# Altium PCB PCB.PcbDoc
Units mm, origin at the board's own origin, x right, y up, seen from the top; angles counter-clockwise.
Board outline 42.29 x 26.42 mm, 2 copper layers (Top Layer, Bottom Layer); 24 components, 17 nets, 73 pads, 7 vias.
Unrouted connection lines stored in the file: 2.
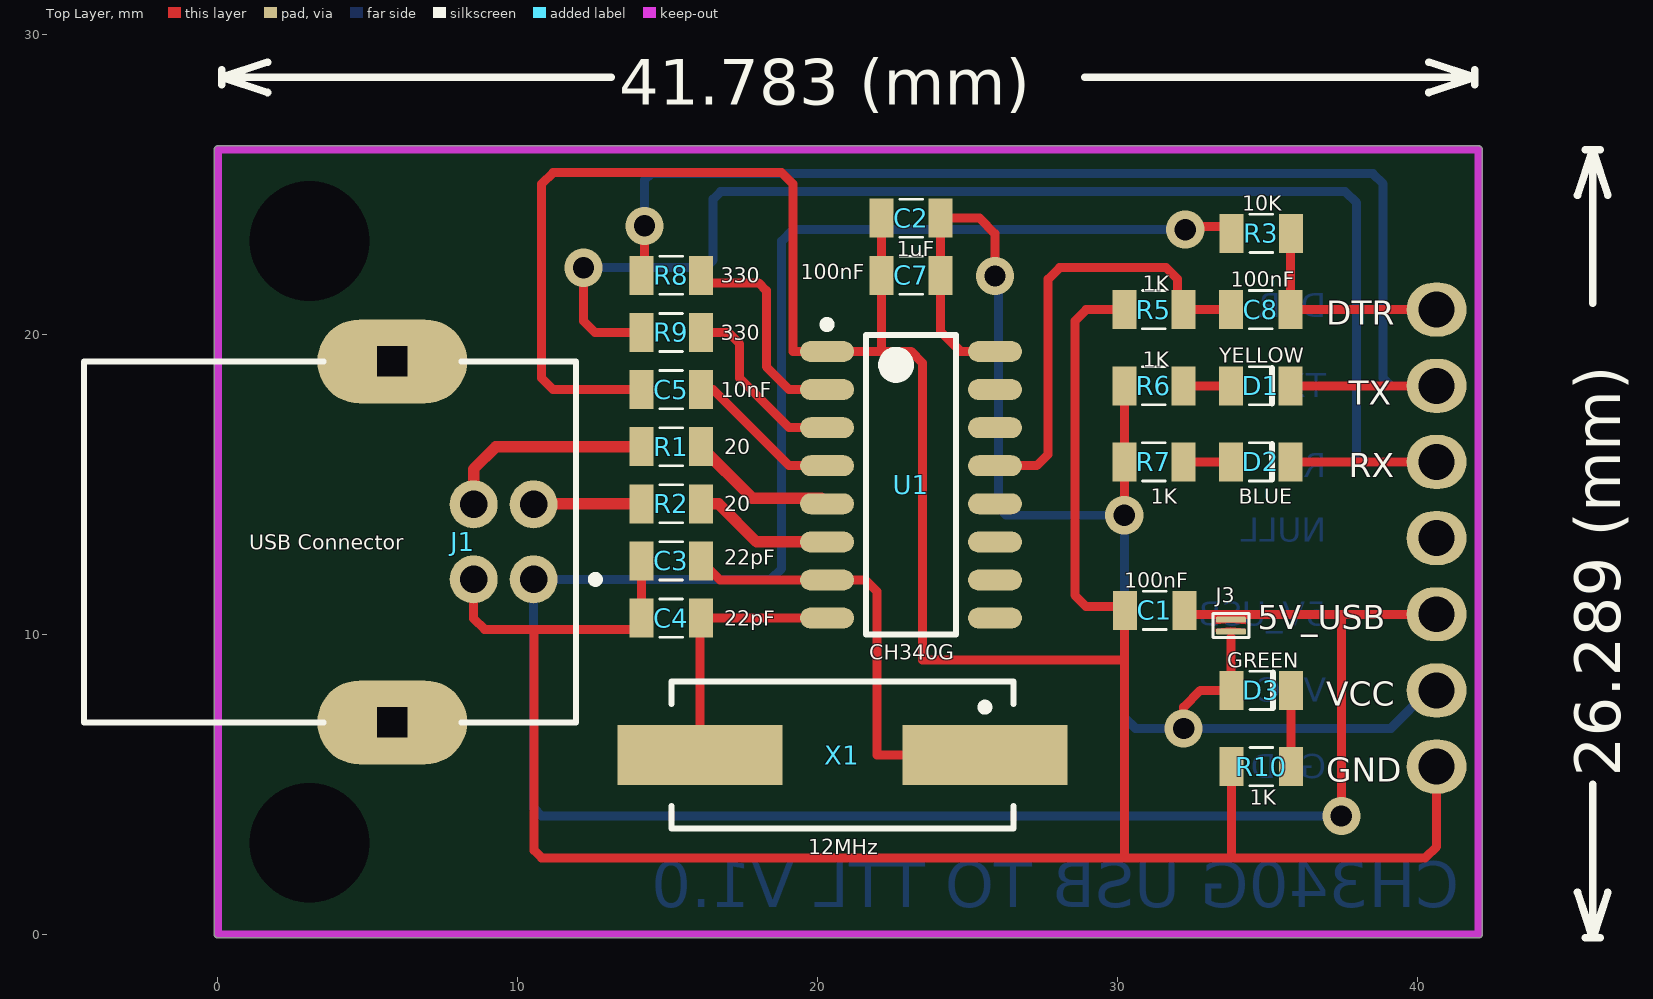
[diagram p0: Top Layer view]
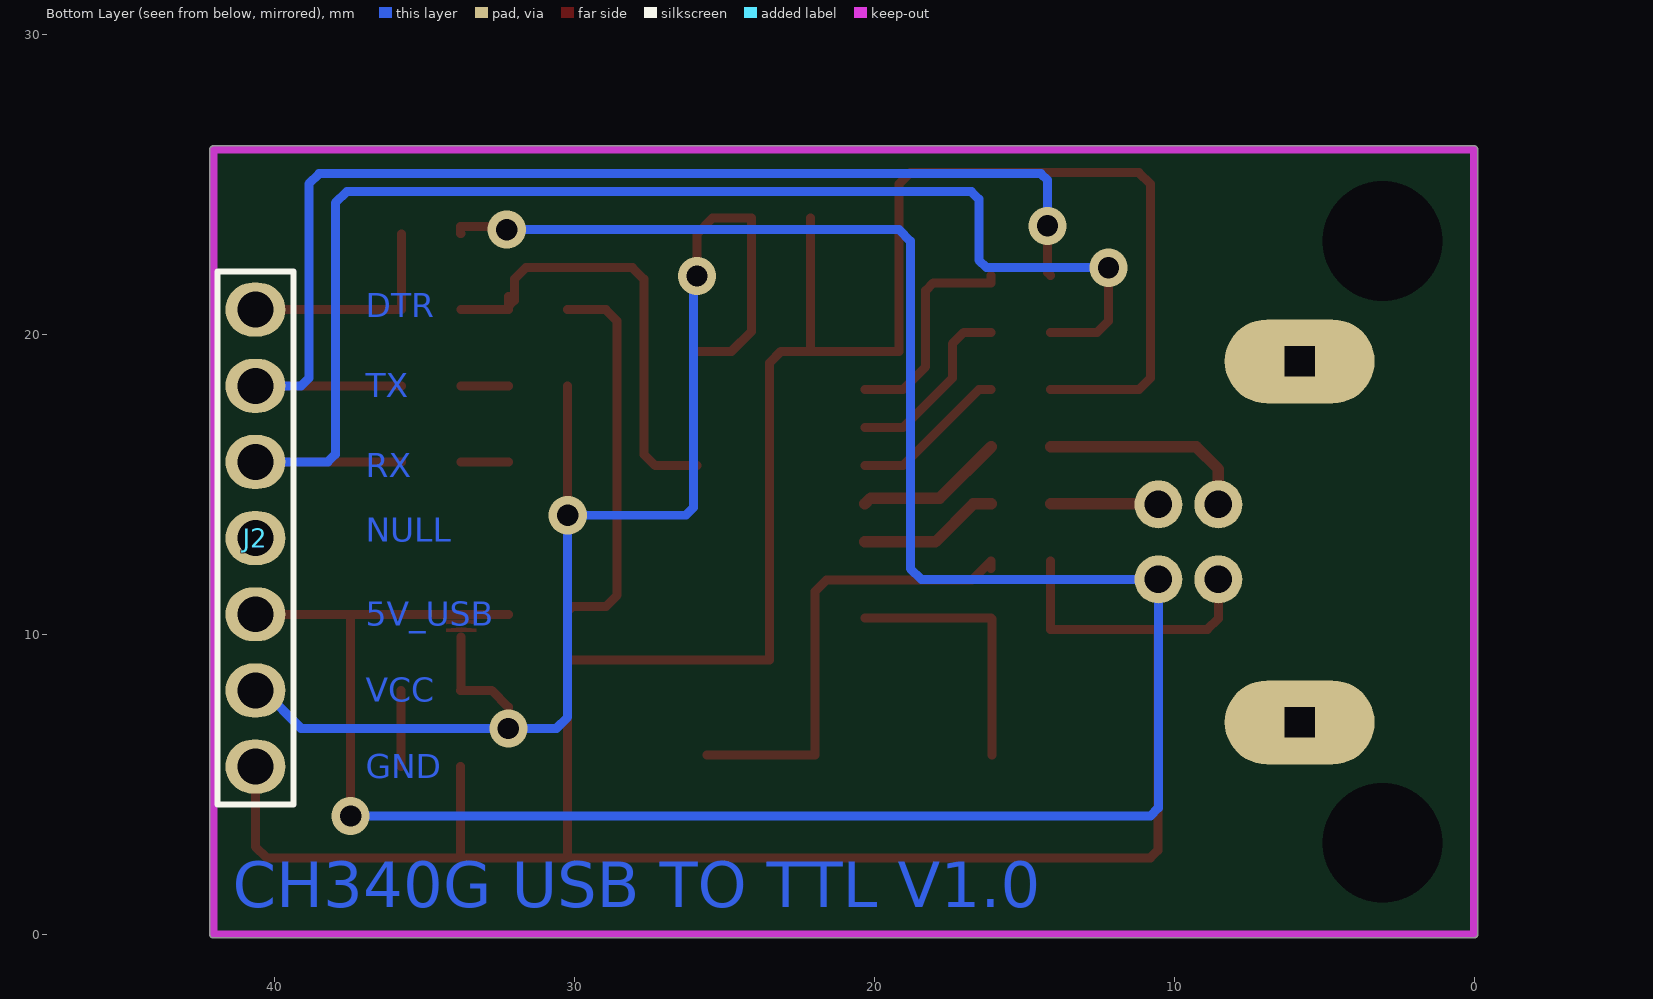
[diagram p1: Bottom Layer view, seen from below]

## Layer stack, top to bottom
Top Solder: solder mask 0.0102, Solder Resist, Dk 3.5
Top Layer: signal copper 0.0356
Dielectric 1: dielectric 0.32, FR-4, Dk 4.8
Bottom Layer: signal copper 0.0356
Bottom Solder: solder mask 0.0102, Solder Resist, Dk 3.5

## Board outline
0,-0.127 cw(c0,0) -0.127,0 -0.127,26.162 cw(c0,26.162) 0,26.289 42.037,26.289 cw(c42.037,26.162) 42.164,26.162 42.164,0 cw(c42.037,0) 42.037,-0.127

## Design rules (kind name [scope] priority, off if disabled: settings)
Clearance [All] p1: gap=0.3
DiffPairsRouting [All] p1: maxlimit=0.254 minlimit=0.254 mostfreqgap=0.254 toplayer_minwidth=0.381 toplayer_maxwidth=0.381 toplayer_prefwidth=0.381 bottomlayer_minwidth=0.381 bottomlayer_maxwidth=0.381 bottomlayer_prefwidth=0.381 maxuncoupledlength=12.7
PolygonConnect [All] p1: connectstyle=Relief reliefconductorwidth=0.254 reliefentries=4 polygonreliefangle="90 Angle" airgapwidth=0.254
RoomDefinition Main [InComponentClass('Main')] p1: confinementstyle=ConfineIn formatcopy=TRUE lockcomponents=FALSE outline -24.638,-46.101 26.162,-46.101 26.162,-20.701 -24.638,-20.701
RoutingVias [All] p1: holewidth=0.711 width=1.27 viastyle="Through Hole" minholewidth=0.5 minwidth=0.8 maxholewidth=0.711 maxwidth=1.27
SolderMaskExpansion [All] p1: expansion=0.102
Width [All] p1: maxlimit=0.3 minlimit=0.3 preferedwidth=0.3
29 further rules are at their usual default settings.

## Classes and differential pairs
differential pair USB2: +USB2_P -USB2_N

## Components (designator, comment, footprint, x,y, rotation, side; value= is the part's Value field where it differs from the comment)
C1 "100nF" 0805 31.242,10.795 r0 top
C2 "1uF" 0805 23.114,23.876 r0 top
C3 "22pF" 0805 15.113,12.446 r180 top
C4 "22pF" 0805 15.113,10.541 r180 top
C5 "10nF" 0805 15.113,18.161 r180 top
C7 "100nF" 0805 23.114,21.971 r0 top
C8 "100nF" 0805 34.773,20.828 r180 top
D1 "YELLOW" 0805_Diode 34.773,18.288 r0 top
D2 "BLUE" 0805_Diode 34.773,15.748 r0 top
D3 "GREEN" 0805_Diode 34.798,8.128 r0 top
J1 "USB Connector" USB2.5-2H4D 9.525,13.081 r180 top
J2 "7PIN" HDR1X7 40.64,20.828 r270 bottom
J3 "Jumper 2pin" Jumper_Solder_2Pad_100X60 33.782,10.287 r270 top
R1 "20" 0805 15.113,16.256 r180 top
R2 "20" 0805 15.113,14.351 r180 top
R3 "10K" 0805 34.798,23.368 r180 top
R5 "1K" 0805 31.217,20.828 r0 top
R6 "1K" 0805 31.217,18.288 r0 top
R7 "1K" 0805 31.217,15.748 r0 top
R8 "330" 0805 15.113,21.971 r180 top
R9 "330" 0805 15.113,20.066 r180 top
R10 "1K" 0805 34.798,5.588 r180 top
U1 "CH340G" SOIC127P602-16BM 23.114,14.986 r0 top
X1 "12MHz" HC49/4H_SMX 20.828,5.969 r180 top

## Footprints (in the part's own frame and the unit in brackets; to place one, negate y for a bottom-side part, rotate by r counter-clockwise, add the part's x,y. Pads: shape width x height; smd on the part's side, far side on the other; paste and mask are expansions set on the pad)
0805 [mm] "Chip Resistor, Body 2.0x1.3mm, IPC Medium Density"
  rect 0.8x1.3 smd: 1(-0.991,0) 2(0.991,0)
  silkscreen extent -0.38,-0.64 0.38,0.64, body extent -1.07,-0.7 1.07,0.7, height 0.65
0805_Diode [mm] "Chip Resistor, Body 2.0x1.3mm, IPC Medium Density"
  rect 0.8x1.3 smd: 1(-0.991,0) 2(0.991,0)
  silkscreen extent -0.38,-0.64 0.38,0.64, body extent -1.07,-0.7 1.07,0.7, height 0.65
HC49/4H_SMX [mm] "Quartz Crystal, SM; Body 13.4 (inc. leads) x 4.9 mm (LxW max)"
  rect 5.5x2 smd: 1(-4.75,0) 2(4.75,0)
  silkscreen extent -5.7,-2.45 5.7,2.45
HDR1X7 [mm]
  oval 1.8x2 hole 1.2: 1(0,0) 2(2.54,0) 3(5.08,0) 4(7.62,0) 5(10.16,0) 6(12.7,0) 7(15.24,0)
  silkscreen extent -1.27,-1.27 16.51,1.27
Jumper_Solder_2Pad_100X60 [mm] "JUMPER SOLDER 1X0.6MM"
  rrect50% 0.2x1 smd mask+0.05: 1(-0.2,0) 2(0.2,0)
  Top Layer region: 0.1,0.5 0.05,0 0.1,-0.5 0.2,-0.5 0.2,0.5
  Top Layer region: -0.2,0.5 -0.05,0.5 -0.1,0 -0.05,-0.5 -0.2,-0.5
  silkscreen extent -0.4,-0.6 0.4,0.6
SOIC127P602-16BM [mm] "SOIC, 16-Leads, Body 9.9x3.9mm, Pitch 1.27mm, IPC Low Density"
  oval 1.8x0.7 smd: 1(-2.8,4.445) 2(-2.8,3.175) 3(-2.8,1.905) 4(-2.8,0.635) 5(-2.8,-0.635) 6(-2.8,-1.905) 7(-2.8,-3.175) 8(-2.8,-4.445) 9(2.8,-4.445) 10(2.8,-3.175) 11(2.8,-1.905) 12(2.8,-0.635) 13(2.8,0.635) 14(2.8,1.905) 15(2.8,3.175) 16(2.8,4.445)
  silkscreen extent -2.92,-5 1.5,5.47, body extent -2,-5 2,5, height 1.73
USB2.5-2H4D [mm] "Connector; USB1.1, Type B, Thru-Hole; 4 Position; Right Angle"
  round 1.6 hole 0.92: 1(-1,1.25) 2(-1,-1.25) 3(1,-1.25) 4(1,1.25)
  oval 5x2.8 hole 1 square: 5(3.71,6.02) 6(3.71,-6.02)
  silkscreen extent -3.18,-6.02 13.99,6.02, body extent -2.41,-6.02 13.99,6.02, height 11.1

## Part data
C1 C2 C3 C4 C5 C7 C8: library part Cap, "Capacitor"
D1 D2 D3: library part "Optical Transmitter", "Typical INFRARED GaAs LED"
J1: library part CONNECTOR_USB
J2: library part "Header 7", "Header, 7-Pin"
J3: "Jumper"
R1 R2 R3 R5 R6 R7 R8 R9 R10: library part Res1, "Resistor"
U1: "USB to UART Interface"
X1: library part XTAL, "Crystal Oscillator"

## Free pads (board coordinates)
  oct 0x0 hole 4: 0(3.048,3.048)
  round 0 hole 4: 0(3.048,23.114)

## Via types
v1: diameter 1.27, hole 0.711, Top Layer to Bottom Layer, tented both sides, 7 vias

## Nets (pads, with @x,y where several pads share a name; then routed paths per layer and width w, separated by ;. In a path a pad name is that pad's centre, name@x,y a point inside that pad or via, vN(x,y) a via of type N, cw(c..) or ccw(c..) an arc to the next point about the centre after c; other vN are vias at no path point)
5V_USB: C1.2 J1.1 J2.5 J3.1 R3.2 | length 84.9
  Top Layer w0.3: C1.2@32.207,10.668 33.782,10.668 37.465,10.668 ; v1(32.258,23.495) 32.36,23.597 33.807,23.597 R3.2 R3.2@33.782,23.368 ; v1(37.465,3.937) 37.465,10.668 ; J2.5 37.465,10.668
  Bottom Layer w0.3: v1@32.365,23.749 32.111,23.495 19.177,23.495 18.796,23.114 18.796,12.192 18.435,11.831 J1.1 10.525,4.207 10.795,3.937 v1(37.465,3.937)
DTR: C8.1 J2.1 R3.1 | length 7.4
  Top Layer w0.3: R3.1@35.763,23.343 C8.1 J2.1
GND: C1.1 C2.1 C3.2 C4.2 C5.2 C7.1 J1.4 J2.7 R5.1 R10.2 U1.1 | length 125.1
  Top Layer w0.3: J1.4 8.525,10.525 8.89,10.16 10.541,10.16 ; C3.2 14.122,10.16 10.541,10.16 ; C5.2 11.176,18.161 10.795,18.542 10.795,25.019 11.176,25.4 18.796,25.4 19.177,25.019 19.177,19.431 U1.1 22.123,19.431 ; C2.1 C7.1 22.123,19.431 ; 30.226,4.064 30.226,2.54 ; R5.1 28.956,20.828 28.575,20.447 28.575,11.303 28.956,10.922 30.074,10.922 30.226,10.77 30.226,9.144 ; 33.807,2.565 R10.2 ; J2.7 40.64,2.921 40.259,2.54 30.226,2.54 ; 10.541,10.16 10.541,2.794 10.795,2.54 30.226,2.54 ; 22.123,19.431 23.114,19.431 23.495,19.05 23.495,9.144 30.226,9.144 ; 30.226,2.54 30.226,9.144
NetC3_1: C3.1 U1.7 X1.1 | length 15.6
  Top Layer w0.3: C3.1@16.104,12.192 C3.1 16.739,11.811 U1.7 21.59,11.811 21.971,11.43 21.971,5.969 X1.1
NetC4_1: C4.1 U1.8 X1.2 | length 8.8
  Top Layer w0.3: X1.2 C4.1@16.078,10.515 ; C4.1 U1.8
NetC5_1: C5.1 U1.4 | length 5.3
  Top Layer w0.3: C5.1 16.51,18.161 19.05,15.621 U1.4
NetC8_2: C8.2 R5.2 U1.13 | length 15.5
  Top Layer w0.3: U1.13 27.305,15.621 27.686,16.002 27.686,21.844 28.067,22.225 31.623,22.225 32.004,21.844 32.004,21.133 R5.2@32.258,20.879 ; R5.2@32.207,21.26 R5.2 C8.2
NetD1_1: D1.1 R6.2 | length 1.6
  Top Layer w0.3: R6.2 D1.1
NetD2_1: D2.1 R7.2 | length 1.6
  Top Layer w0.3: R7.2 D2.1
NetD3_2: D3.2 R10.1 | length 2.5
  Top Layer w0.3: R10.1 D3.2
NetJ1_2: J1.2 R2.2 | length 3.6
  Top Layer w0.3: J1.2 J1.2@10.545,14.351
  Top Layer w0.381: J1.2@10.545,14.351 R2.2
NetJ1_3: J1.3 R1.2 | length 7.1
  Top Layer w0.381: J1.3 8.525,15.51 9.271,16.256 R1.2
RXD: D2.2 J2.3 R9.1 R9.2 U1.3 | length 54.3
  Top Layer w0.3: v1(12.192,22.225) 12.192,20.447 12.573,20.066 R9.2 ; R9.1 17.018,20.066 17.399,19.685 17.399,18.542 19.05,16.891 U1.3 ; D2.2 J2.3
  Bottom Layer w0.3: v1(12.192,22.225) 16.256,22.225 16.51,22.479 16.51,24.511 16.764,24.765 37.592,24.765 37.973,24.384 37.973,16.002 38.227,15.748 J2.3
TXD: D1.2 J2.2 R8.1 R8.2 U1.2 | length 48.8
  Top Layer w0.3: R8.2 14.224,22.073 v1(14.224,23.622) ; R8.1 16.104,21.717 18.034,21.717 18.288,21.463 18.288,18.923 19.05,18.161 U1.2 ; D1.2 J2.2
  Bottom Layer w0.3: v1(14.224,23.622) 14.224,25.146 14.443,25.365 38.516,25.365 38.862,25.019 38.862,18.542 39.116,18.288 J2.2
USB2_N: R2.1 U1.6 | length 4.7
  Top Layer w0.381: R2.1 16.694,14.351 17.964,13.081 U1.6
USB2_P: R1.1 U1.5 | length 5
  Top Layer w0.381: R1.1 17.818,14.541 20.124,14.541 U1.5
VCC: C2.2 C7.2 D3.1 J2.6 J3.2 R6.1 R7.1 U1.16 | length 47.6
  Top Layer w0.3: U1.16 24.765,19.431 24.105,20.091 C7.2 C2.2 25.4,23.876 25.914,23.362 v1(25.914,21.952) ; v1(30.226,13.97) R7.1 R6.1 ; v1(32.207,6.858) 32.207,7.569 32.766,8.128 D3.1 ; D3.1@33.782,8.153 33.782,9.906
  Bottom Layer w0.3: v1@26.035,21.831 26.035,14.224 26.289,13.97 v1(30.226,13.97) 30.226,7.239 30.607,6.858 v1(32.207,6.858) 39.116,6.858 40.386,8.128 J2.6
pads on no net: J1.5 J1.6 J2.4 U1.9 U1.10 U1.11 U1.12 U1.14 U1.15

## Keep-outs
Keep-Out Layer:
  lines w0.254: 0,0 42.037,0 42.037,26.162 0,26.162 0,0

## Other copper
Bottom Layer:
  text "DTR" at 36.957,20.574 h0.8
  text "TX" at 36.957,17.907 h0.8
  text "RX" at 36.957,15.24 h0.8
  text "NULL" at 36.957,13.081 h0.8
  text "5V_USB" at 36.957,10.287 h0.8
  text "VCC" at 36.957,7.747 h0.8
  text "GND" at 36.957,5.207 h0.8
  text "CH340G USB TO TTL V1.0" at 41.402,0.889 h1.52

## Silkscreen, mask and mechanical layers (free items; w line width, h text height)
Top Overlay:
  lines w0.254: 0.127,28.321 0.127,28.829 ; 1.651,28.067 0.127,28.575 ; 1.651,29.083 0.127,28.575 ; 13.122,28.575 0.127,28.575 ; 28.915,28.575 41.91,28.575 ; 40.386,28.067 41.91,28.575 ; 40.386,29.083 41.91,28.575 ; 41.91,28.321 41.91,28.829 ; 45.339,1.397 45.847,-0.127 ; 45.339,24.638 45.847,26.162 ; 45.593,-0.127 46.101,-0.127 ; 45.593,26.162 46.101,26.162 ; 45.847,4.994 45.847,-0.127 ; 45.847,21.041 45.847,26.162 ; 46.355,1.397 45.847,-0.127 ; 46.355,24.638 45.847,26.162
  text "41.783 (mm)" at 13.376,27.661 h1.52
  text "DTR" at 36.957,20.32 h0.8
  text "TX" at 37.719,17.653 h0.8
  text "RX" at 37.719,15.24 h0.8
  text "5V_USB" at 34.671,10.16 h0.8
  text "VCC" at 36.957,7.62 h0.8
  text "26.289 (mm)" at 46.761,5.248 h1.52 r90
  text "GND" at 36.957,5.08 h0.8
Mechanical 15:
  rectangle: 3.556,3.937 5.08,5.461
  rectangle: 14.478,3.937 16.002,5.461
  rectangle: 5.842,0.381 7.366,1.905
  rectangle: 9.652,0.381 11.176,1.905
  rectangle: 9.652,-2.159 11.176,-0.635
  rectangle: 5.842,-2.159 7.366,-0.635
  rectangle: 5.842,-4.699 7.366,-3.175
  rectangle: 9.652,-4.699 11.176,-3.175
  rectangle: 30.226,2.667 31.75,4.191
  rectangle: 25.654,0.127 27.178,1.651
  rectangle: 27.94,-0.635 29.464,0.889
  rectangle: 30.226,-2.667 31.75,-1.143
  rectangle: 23.114,-0.889 24.638,0.635
  rectangle: 20.066,1.905 21.59,3.429
  rectangle: 28.194,-4.699 29.718,-3.175
  rectangle: 23.114,-4.445 24.638,-2.921
  rectangle: 30.226,-8.001 31.75,-6.477
  rectangle: 25.654,-5.461 27.178,-3.937
  rectangle: 13.208,-8.509 14.732,-6.985
  rectangle: 13.462,-11.049 14.986,-9.525
  rectangle: 17.272,-11.049 18.796,-9.525
  rectangle: 17.272,-8.763 18.796,-7.239